# Altium PCB BISSC.PcbDoc
Units mm, origin at the board's own origin, x right, y up, seen from the top; angles counter-clockwise.
Board outline 56.9 x 61.5 mm, 2 copper layers (Top Layer, Bottom Layer), stack 0.143 mm thick; 29 components, 22 nets, 150 pads, 29 vias.
Unrouted connection lines stored in the file: 11.
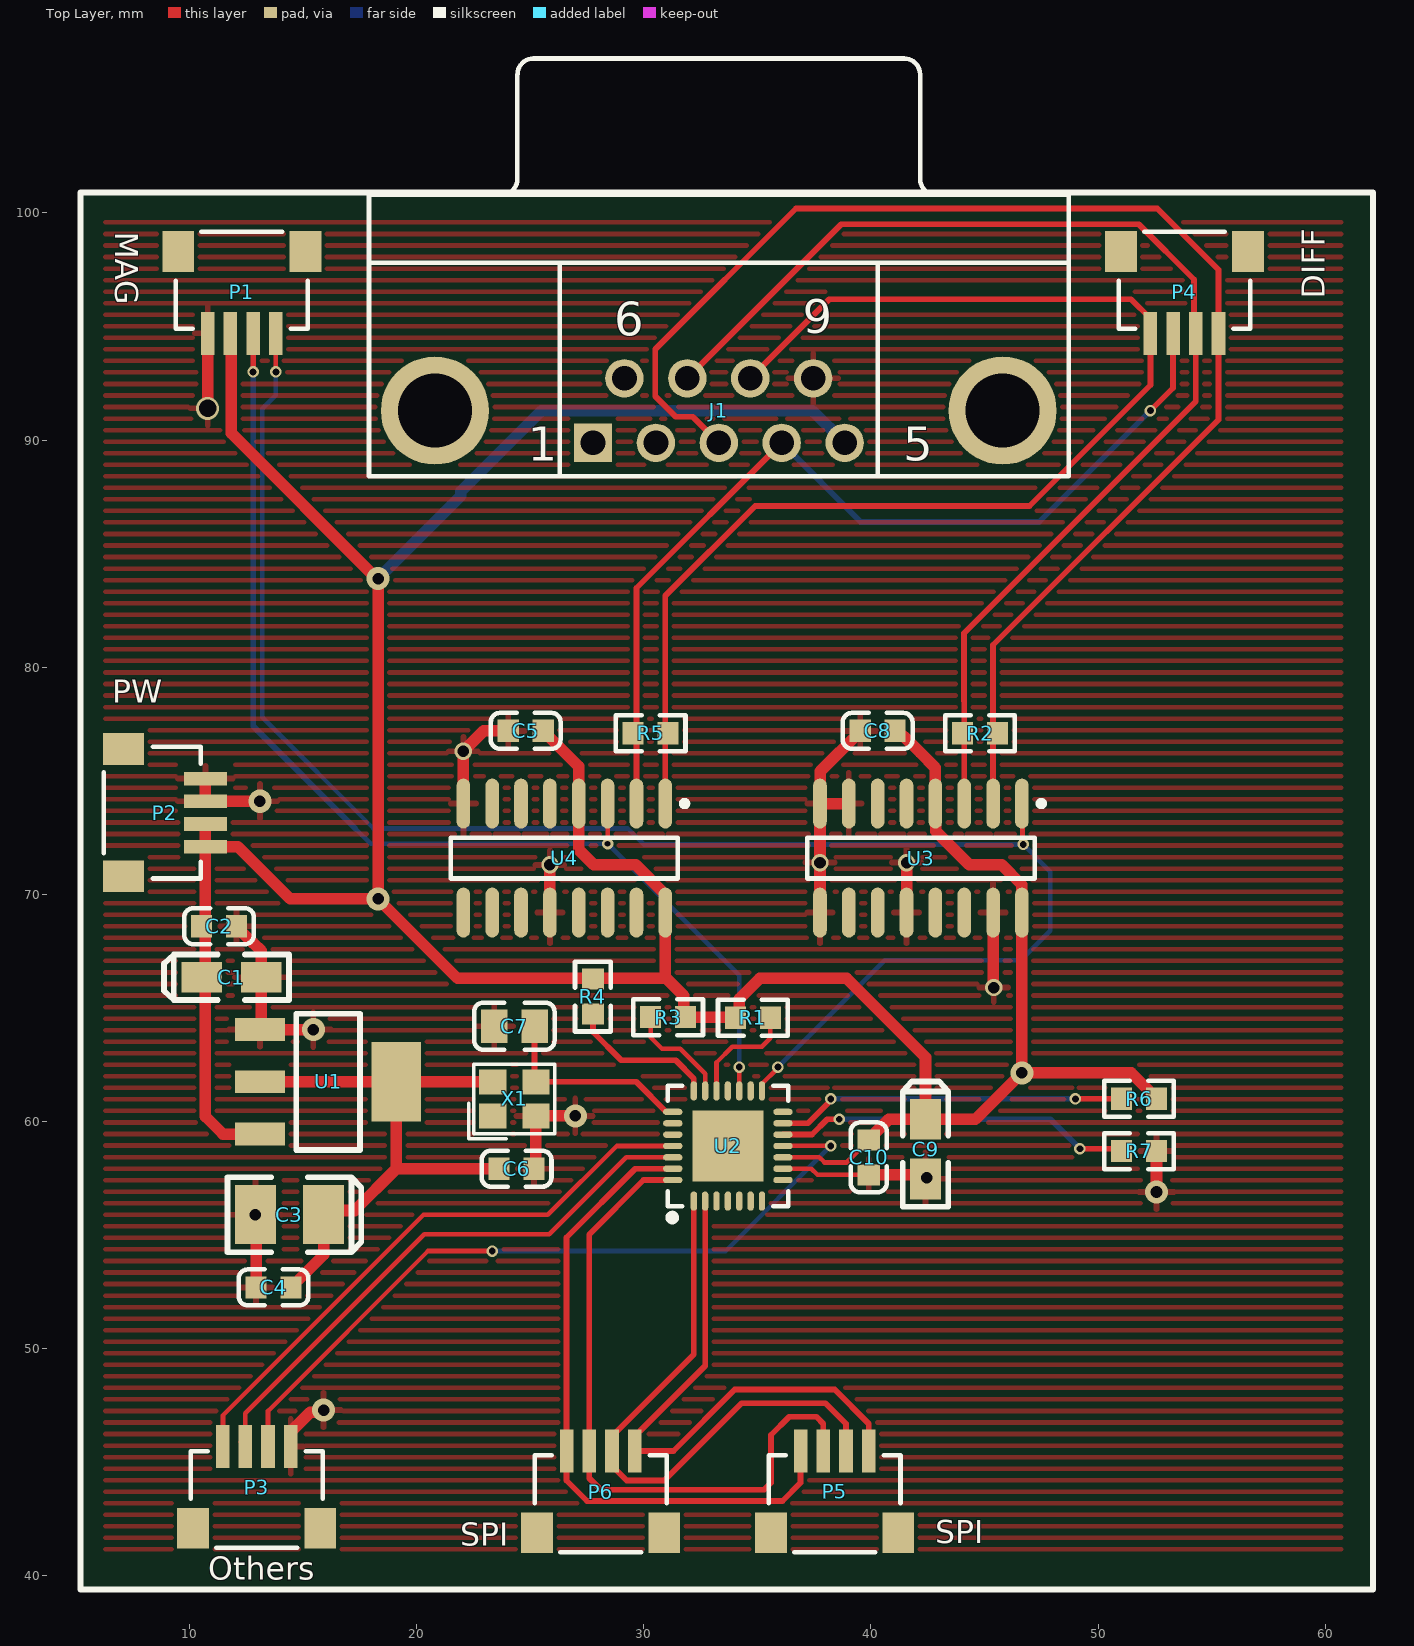
[diagram p0: Top Layer view]
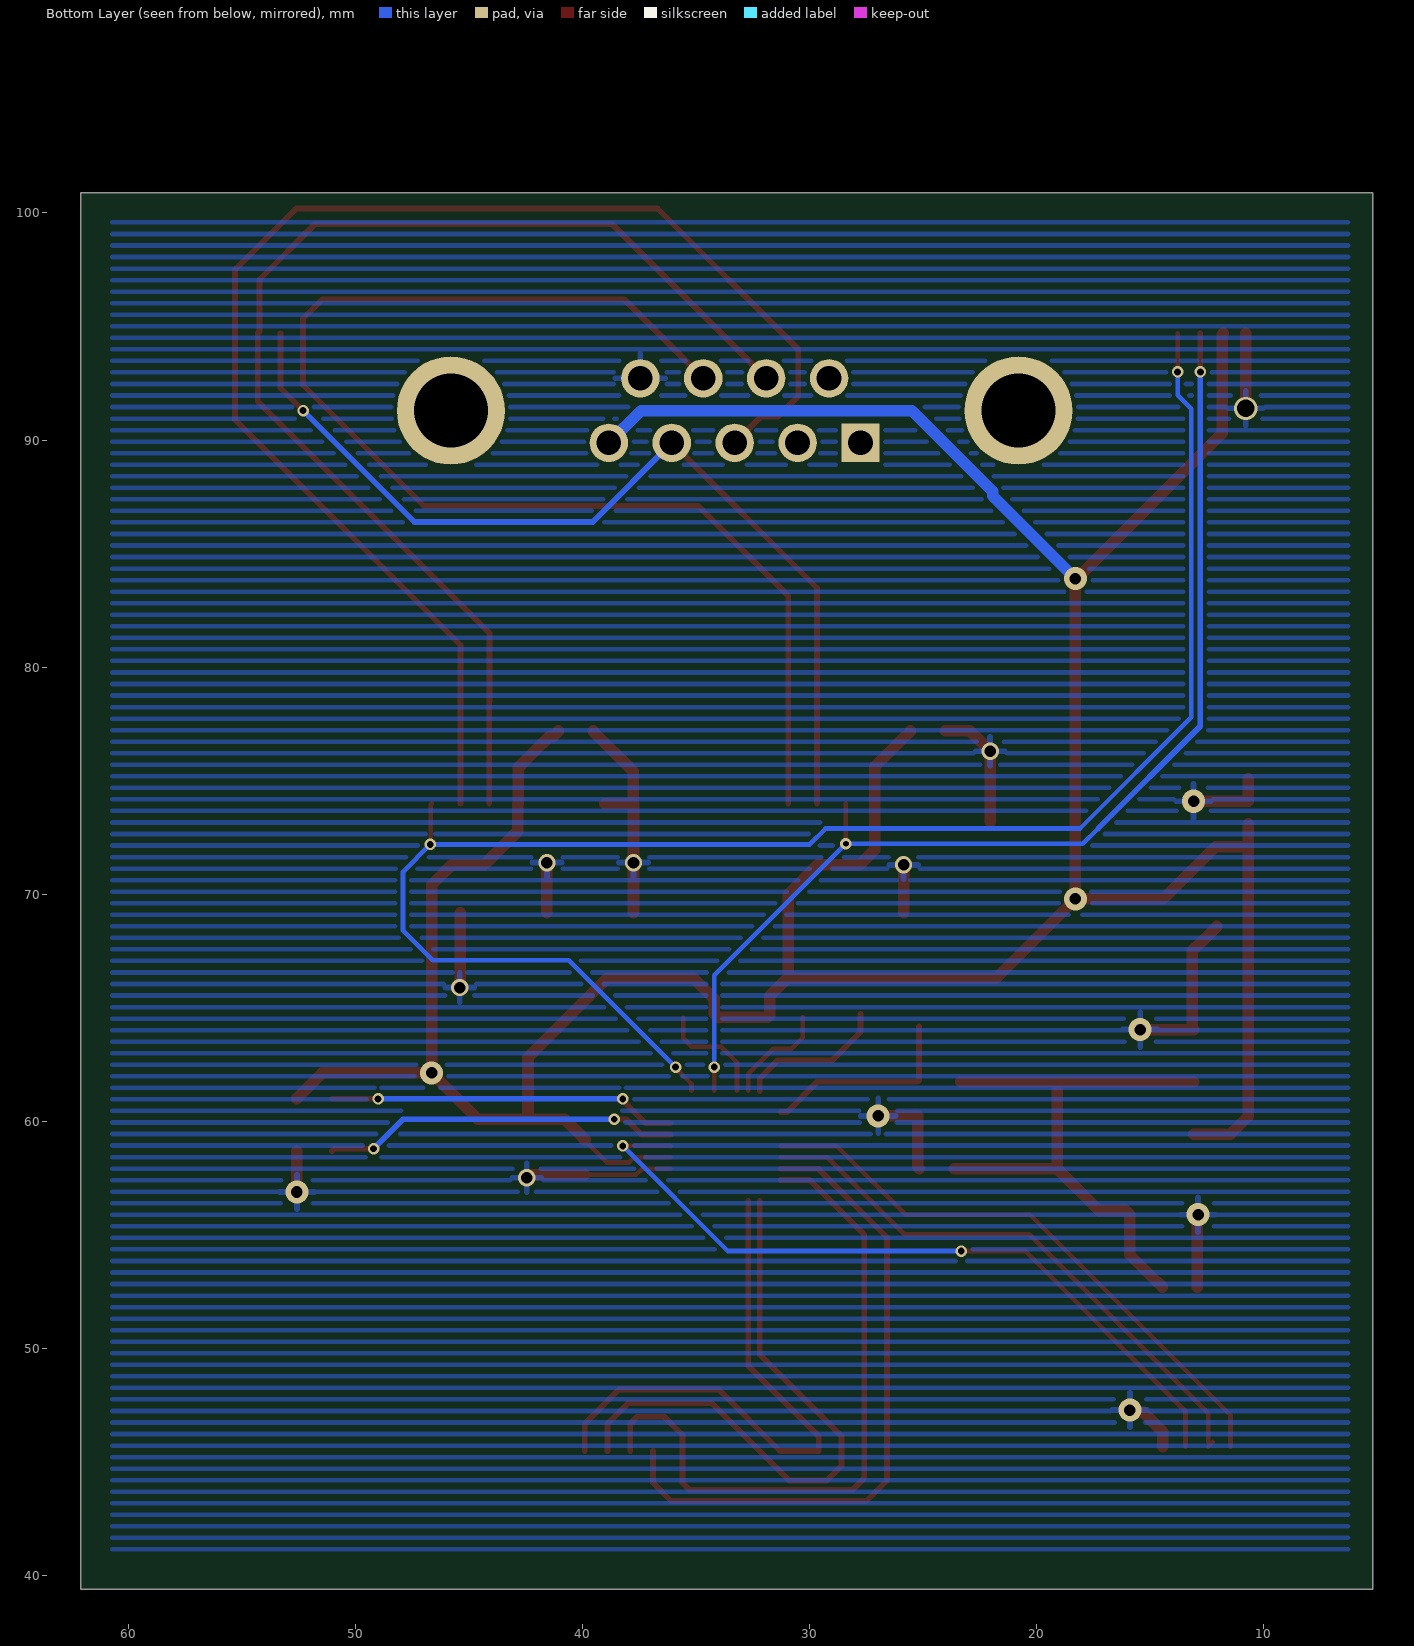
[diagram p1: Bottom Layer view, seen from below]
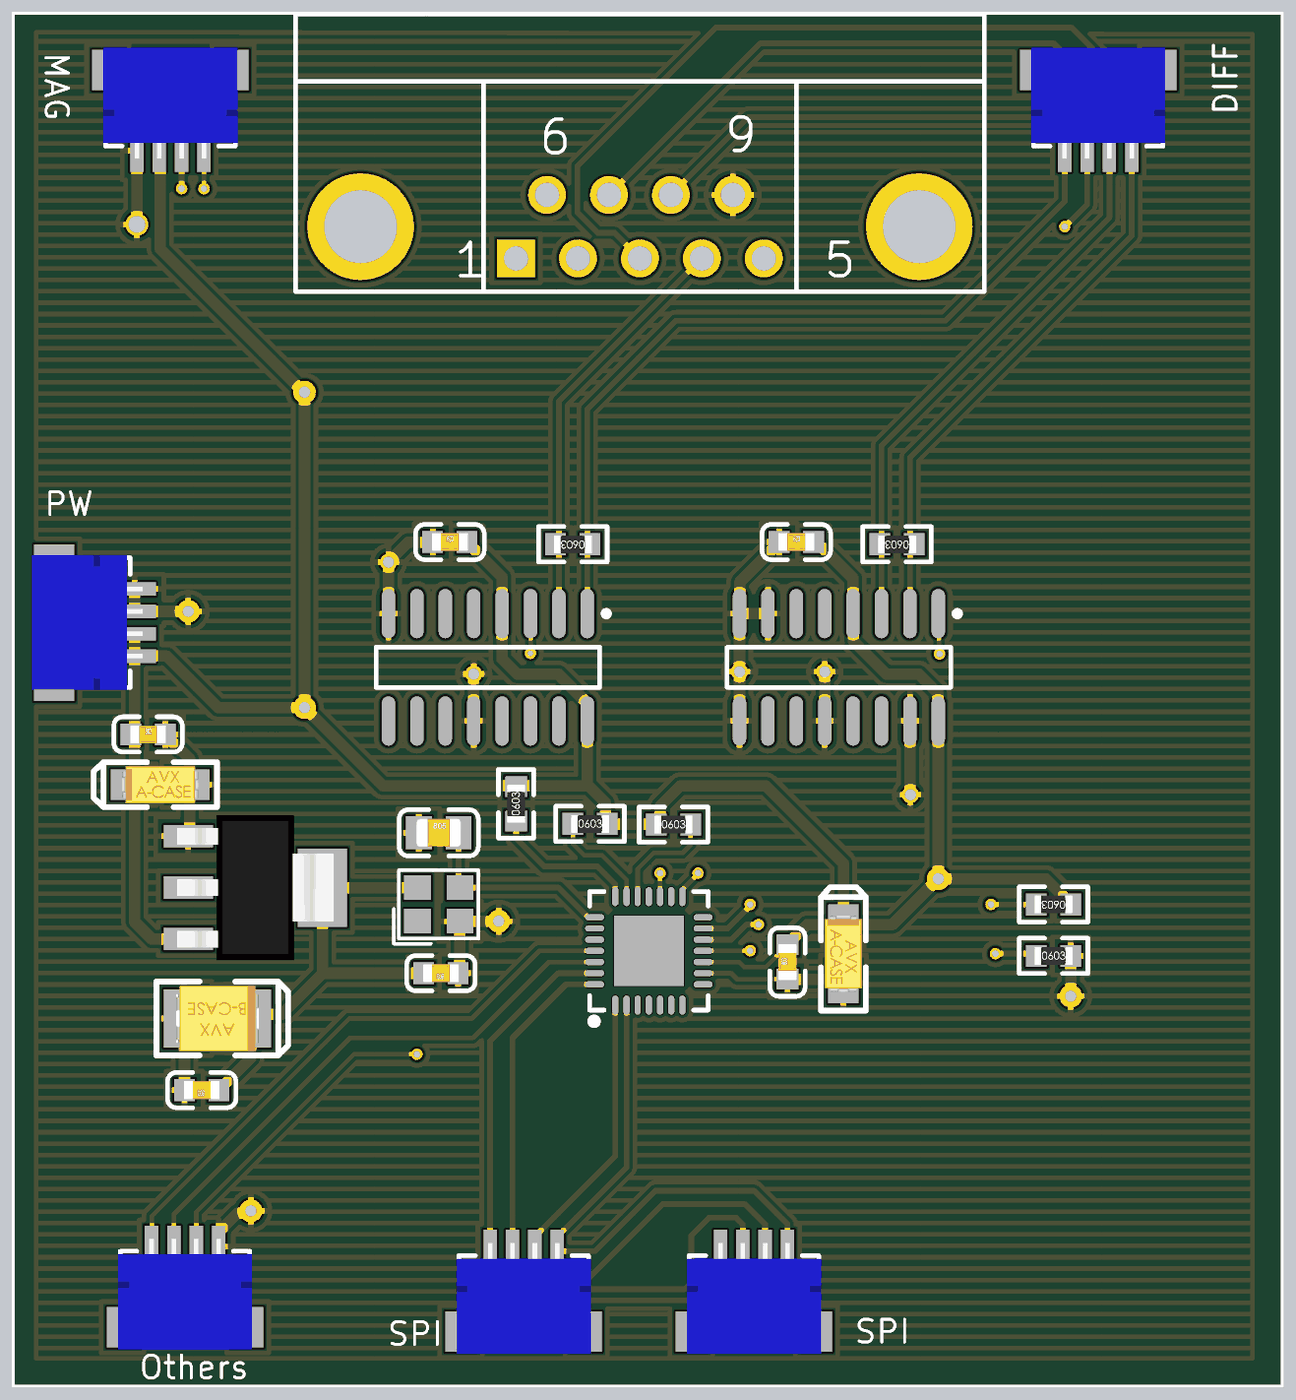
[diagram p2: 3D render of the assembled board from above, using the file's embedded part models]

## Layer stack, top to bottom
Top Solder: solder mask 0.01, Solder Resist, Dk 3.5
Top Layer: signal copper 0.036
Dielectric 3: prepreg 0.071, PP-006, Dk 4.1
Bottom Layer: signal copper 0.036
Bottom Solder: solder mask 0.01, Solder Resist, Dk 3.5

## Board outline
5.2,39.4 5.2,100.9 62.1,100.9 62.1,39.4

## Design rules (kind name [scope] priority, off if disabled: settings)
Clearance [All] p1: gap=0.15 ignorepadtopadclearanceinfootprint=FALSE
HoleSize [All] p1: absolutevalues=TRUE maxlimit=5.08 minlimit=0.025 maxpercent=80.000 minpercent=20.000
MinimumSolderMaskSliver [All] p1: minsoldermaskwidth=0
PolygonConnect [All] p1: connectstyle=Relief reliefconductorwidth=0.254 reliefentries=4 polygonreliefangle="90 Angle" airgapwidth=0.254
RoutingVias [All] p1: holewidth=0.711 width=1.27 viastyle="Through Hole" minholewidth=0.711 minwidth=1.27 maxholewidth=0.711 maxwidth=1.27
SilkToSilkClearance [All] p1: silktosilkclearance=0.1
SilkToSolderMaskClearance [IsPad] p1: minsilkscreentomaskgap=0.05 clearancetoexposedcopper=TRUE
SolderMaskExpansion [All] p1: expansion=0.102 istentingtop=FALSE
Width [All] p1: maxlimit=1.27 minlimit=0.01 preferedwidth=0.254
26 further rules are at their usual default settings.

## Components (designator, comment, footprint, x,y, rotation, side; value= is the part's Value field where it differs from the comment)
C1 "10uF (106) ±10% 16V" CASE-A_3216 11.846,66.355 r180 top
C2 "100nF (104) 10% 50V" 0603_C 11.3,68.6 r0 top
C3 "22uF (226) ±10% 16V" CASE-B_3528 14.4,55.9 r0 top
C4 "100nF (104) 10% 50V" 0603_C 13.7,52.7 r180 top
C5 "100nF (104) 10% 50V" 0603_C 24.8,77.2 r0 top
C6 "100nF (104) 10% 50V" 0603_C 24.4,57.925 r180 top
C7 "15uF (104) 10% 50V" 0805_C 24.3,64.2 r0 top
C8 "100nF (104) 10% 50V" 0603_C 40.295,77.2 r0 top
C9 "10uF (106) ±10% 16V" CASE-A_3216 42.4,58.79 r90 top
C10 "100nF (104) 10% 50V" 0603_C 39.9,58.425 r90 top
J1 "D Connector 9" DSUB1.385-2H9 33.3,100.8 r0 top
P1 "MHDR1X4" SH1.0-4P-L 12.3,96.5 r180 top
P2 "MHDR1X4" SH1.0-4P-L 8.9,73.6 r270 top
P3 "MHDR1X4" SH1.0-4P-L 12.956,43.896 r0 top
P4 "MHDR1X4" SH1.0-4P-L 53.8,96.5 r180 top
P5 "MHDR1X4" SH1.0-4P-L 38.4,43.7 r0 top
P6 "MHDR1X4" SH1.0-4P-L 28.1,43.7 r0 top
R1 "10KΩ (103) ±1%" 0603_R 34.8,64.57 r0 top
R2 "120Ω (1200) ±1%" 0603_R 44.8,77.1 r180 top
R3 "10KΩ (103) ±1%" 0603_R 31.07,64.6 r0 top
R4 "10KΩ (103) ±1%" 0603_R 27.76,65.5 r90 top
R5 "0Ω (0) ±1%" 0603_R 30.3,77.1 r180 top
R6 "1KΩ (102) ±1%" 0603_R 51.8,61 r180 top
R7 "10KΩ (103) ±1%" 0603_R 51.8,58.7 r0 top
U1 "AMS1117-3.3" SOT-223 16.1,61.75 r180 top
U2 "iC-MB4" QFN-28_5x5x05P 33.7,58.925 r0 top
U3 "AM26LS31" SO-16_N 42.2,71.6 r270 top
U4 "AM26LS32" SO-16_N 26.5,71.6 r270 top
X1 "20MHz" OSC-SMD_4P-L2.5-W2.0-BL 24.3,61 r0 top

## Footprints (in the part's own frame and the unit in brackets; to place one, negate y for a bottom-side part, rotate by r counter-clockwise, add the part's x,y. Pads: shape width x height; smd on the part's side, far side on the other; paste and mask are expansions set on the pad)
0603_C [mm]
  rect 0.93x0.98 smd: 1(-0.77,0) 2(0.77,0)
  silkscreen extent -1.53,-0.79 1.54,0.79, body extent -0.8,-0.4 0.8,0.4, height 0.3
0603_R [mm]
  rect 0.93x0.98 smd: 1(-0.77,0) 2(0.77,0)
  silkscreen extent -1.54,-0.79 1.54,0.79, body extent -0.85,-0.4 0.85,0.4, height 0.56
0805_C [mm]
  rect 1.16x1.47 smd: 1(-0.89,0) 2(0.89,0)
  silkscreen extent -1.77,-1.04 1.77,1.04, body extent -1,-0.62 1,0.63, height 0.77
CASE-A_3216 [mm]
  rect 1.8x1.35 smd: 1(1.31,0) 2(-1.31,0)
  silkscreen extent -2.54,-1 2.97,1, body extent -1.7,-0.84 1.7,0.84, height 1.71
CASE-B_3528 [mm]
  rect 1.8x2.6 smd: 1(1.5,0) 2(-1.5,0)
  silkscreen extent -2.73,-1.65 3.16,1.65, body extent -1.85,-1.47 1.85,1.46, height 2.03
DSUB1.385-2H9 [mm] "Connector; D Subminiature; 9 Position; Right Angle; Pitch 1.385 mm"
  rect 1.69x1.69 hole 1.09: 1(-5.54,-10.92)
  round 1.69 hole 1.09: 2(-2.77,-10.92) 3(0,-10.92) 4(2.77,-10.92) 5(5.54,-10.92) 6(-4.155,-8.08) 7(-1.385,-8.08) 8(1.385,-8.08) 9(4.155,-8.08)
  round 4.76 hole 3.26: 10(-12.495,-9.5) 11(12.495,-9.5)
  silkscreen extent -15.4,-12.4 15.4,6
OSC-SMD_4P-L2.5-W2.0-BL [mm]
  rect 1.2x1.1 smd: 1(-0.95,-0.75) 2(0.95,-0.75) 3(0.95,0.75) 4(-0.95,0.75)
  silkscreen extent -2.01,-1.76 1.78,1.53
QFN-28_5x5x05P [mm]
  rect 3.13x3.13 smd mask+0.051: 0(0,0)
  oval 0.28x0.85 smd mask+0.051: 1(-1.5,-2.425) 2(-1,-2.425) 3(-0.5,-2.425) 4(0,-2.425) 5(0.5,-2.425) 6(1,-2.425) 7(1.5,-2.425) 15(1.5,2.425) 16(1,2.425) 17(0.5,2.425) 18(0,2.425) 19(-0.5,2.425) 20(-1,2.425) 21(-1.5,2.425)
  oval 0.85x0.28 smd mask+0.051: 8(2.425,-1.5) 9(2.425,-1) 10(2.425,-0.5) 11(2.425,0) 12(2.425,0.5) 13(2.425,1) 14(2.425,1.5) 22(-2.425,1.5) 23(-2.425,1) 24(-2.425,0.5) 25(-2.425,0) 26(-2.425,-0.5) 27(-2.425,-1) 28(-2.425,-1.5)
  silkscreen extent -2.65,-3.3 2.65,2.65
SH1.0-4P-L [mm]
  rect 1.4x1.8 smd: 0(-2.8,-1.8) 0(2.8,-1.8)
  rect 0.6x1.9 smd: 1(-1.5,1.8) 2(-0.5,1.8) 3(0.5,1.8) 4(1.5,1.8)
  silkscreen extent -2.9,-2.67 2.9,1.6, body extent -3,-2.79 3,2.16, height 2.96
SO-16_N [mm] "SOIC, 16-Leads, Body 9.9x3.9mm, Pitch 1.27mm, IPC Medium Density"
  oval 2.2x0.6 smd: 1(-2.4,4.445) 2(-2.4,3.175) 3(-2.4,1.905) 4(-2.4,0.635) 5(-2.4,-0.635) 6(-2.4,-1.905) 7(-2.4,-3.175) 8(-2.4,-4.445) 9(2.4,-4.445) 10(2.4,-3.175) 11(2.4,-1.905) 12(2.4,-0.635) 13(2.4,0.635) 14(2.4,1.905) 15(2.4,3.175) 16(2.4,4.445)
  silkscreen extent -2.52,-5 0.9,5.42, body extent -2,-5 2,5, height 1.75
SOT-223 [mm]
  rect 2.2x1 smd: 1(3,-2.3) 2(3,0) 3(3,2.3)
  rect 2.2x3.5 smd: 2(-3,0)
  silkscreen extent -1.4,-3 1.4,3, body extent -3.49,-3.24 3.49,3.24, height 1.64

## Part data
C1 C3 C9: library part "3216 10uF (106) 10% 16V", "钽电容", Package=3216, SuppliersPartNumber=C7171, ComponentLink1Description=供应商链接, ComponentLink1URL=http://www.szlcsc.com/product/details_7643.html, Supplier=LC
C2 C4 C5 C6 C7 C8 C10: library part "0603 100nF (104) 10% 50V", "贴片电容", Package=0603, SuppliersPartNumber=C14663, ComponentLink1Description=供应商链接, ComponentLink1URL=http://www.szlcsc.com/product/details_15331.html, Supplier=LC
J1: "Receptacle Assembly, 9 Position, Right Angle", PackageDocument=O, DatasheetDocument=1-Sep-1999, Gender=Receptacle, LatestRevisionDate=17-Jul-2002, LatestRevisionNote="Re-released for DXP Platform.", Orientation="Right Angle", PackageReference=788750, Positions=9, Published=15-Jun-2001, Publisher="Altium Limited"
P1 P2 P3 P4 P5 P6: "Header, 4-Pin", LatestRevisionDate=17-Jul-2002, LatestRevisionNote="Re-released for DXP Platform.", Publisher="Altium Limited"
R1 R2 R3 R4 R5 R6 R7: library part "0603 360Ω (3600) 1%", "贴片电阻", Package=0603, SuppliersPartNumber=C25194, ComponentLink1Description=供应商链接, ComponentLink1URL=http://www.szlcsc.com/product/details_25937.html, Supplier=LC
U1: library part AMS1117, "3.3V稳压芯片"
U2: "SPI转BiSS主站芯片"
U3: "AM32LS31 单端转差分芯片"
U4: "AM26LS32 差分转单端"
X1: library part OT252020MJBA4SL, "2015 osc", Frequency Stability(Full temperature range)=±10ppm, JLCPCB Part Class="Extended Part", LCSC Part Name="20MHz ±10ppm 1.8V~3.3V YSO110TR", Manufacturer=YXC(扬兴晶振), Operating Temperature=-40℃~+85℃, Supply Current (Max)=4mA, Supply Voltage=1.8V~3.3V, Add into BOM=yes, Convert to PCB=yes, Datasheet=https://atta.szlcsc.com/upload/public/pdf/source/20210329/C669065_30B18CFE780D377BA4E84F6ED1951959.pdf, Device=OT252020MJBA4SL, Manufacturer Part=OT252020MJBA4SL, Name=20MHz, Supplier=LCSC, Supplier Footprint=SMD2520-4P, Supplier Part=C669067, Symbol=OT252020MJBA4SL

## Via types
v1: diameter 0.508, hole 0.3, Top Layer to Bottom Layer, 12 vias
v2: diameter 1.016, hole 0.508, Top Layer to Bottom Layer, 9 vias
v3: diameter 0.762, hole 0.508, Top Layer to Bottom Layer, 6 vias
v4: diameter 1.016, hole 0.762, Top Layer to Bottom Layer, 1 vias
v5: diameter 0.508, hole 0.254, Top Layer to Bottom Layer, 1 vias

## Nets (pads, with @x,y where several pads share a name; then routed paths per layer and width w, separated by ;. In a path a pad name is that pad's centre, name@x,y a point inside that pad or via, vN(x,y) a via of type N, cw(c..) or ccw(c..) an arc to the next point about the centre after c; other vN are vias at no path point)
CLK+: J1.3 P4.1 R2.1 U3.2 | length 61.8
  Top Layer w0.254: J1.3 32.153,91.027 31.403,91.027 30.5,91.93 30.5,94 36.7,100.2 52.6,100.2 55.3,97.5 P4.1 55.3,90.9 45.375,80.975 45.375,77.1 U3.2
CLK-: J1.7 P4.2 R2.2 U3.3 | length 53.5
  Top Layer w0.254: J1.7 38.695,99.5 51.792,99.5 54.218,97.074 54.218,94.782 P4.2 54.3,91.7 44.1,81.5 44.1,78.53 44.105,78.525 44.105,77.1 U3.3
CS: P5.1 P6.1 U2.27 | length 29
  Top Layer w0.254: U2.27 31.27,57.92 29.62,57.92 26.6,54.9 P6.1 26.6,44.2 27.5,43.3 36.1,43.3 36.9,44.1 P5.1
EOT: P3.3 U2.11 | length 33.3
  Top Layer w0.203: P3.3 13.456,47.256 20.5,54.3 v1(23.325,54.3) ; U2.11 36.128,58.928 38.227,58.928 v1(38.23,58.931)
  Bottom Layer w0.203: v1(23.325,54.3) 33.599,54.3 v1(38.23,58.931)
EXCLK: C7.2 U2.22 X1.3 | length 9
  Top Layer w0.203: X1.3@25.19,61.81 X1.3
  Top Layer w0.254: X1.3@25.19,61.81 C7.2 ; X1.3 29.665,61.75 30.99,60.425 U2.22
GND: C1.2 C2.2 C3.2 C4.2 C5.1 C6.1 C7.1 C8.1 C9.2 C10.1 J1.9 P1.4 P2.1 P2.2 P3.4 R7.2 U1.1 U2.9 U3.7 U3.8 U3.9 U3.12 U3.15 U4.8 U4.12 X1.2 | length 55.2
  Top Layer w0.203: U2.9 37.375,57.925 37.645,57.655 C10.1
  Top Layer w0.508: P2.1 P2.2 v2(13.1,74.1) ; v4(10.8,91.4) P1.4 ; C2.2 12.07,68.575 12.772,67.873 12.797,67.873 13.156,67.514 C1.2 13.156,64.106 U1.1 v2(15.45,64.05) ; v2(12.9,55.9) 12.93,55.87 C4.2 ; P3.4 14.456,46.346 15.313,47.203 15.803,47.203 v2(15.9,47.3) ; U4.8@22.055,73.2 U4.8 v3(22.055,76.3) 22.955,77.2 C5.1 ; C6.1 25.25,58.005 X1.2 v2(26.985,60.25) ; U4.12 v3(25.865,71.3) ; U3.9 v3(37.755,71.4) U3.8 ; U3.7 U3.8 ; C8.1 39.525,77.175 37.773,75.423 37.773,74.018 U3.8 ; C10.1 42.325,57.655 v3(42.45,57.53) ; U3.12 v3(41.565,71.4) ; U3.15 45.387,69.187 45.387,65.913 v3(45.4,65.9) ; v2(52.57,56.9) R7.2
MA: P1.1 U2.15 U3.1 | length 74.9
  Top Layer w0.203: v1(13.8,93) P1.1 ; U2.15 35.2,61.656 35.9,62.356 v1(35.9,62.4) ; U3.1 46.672,73.972 46.672,72.228 v1(46.7,72.2)
  Bottom Layer w0.203: v1(13.8,93) 13.8,91.975 13.2,91.375 13.2,77.8 18.1,72.9 29.3,72.9 30,72.2 v1(46.7,72.2) 47.9,71 47.9,68.405 46.595,67.1 40.6,67.1 v1(35.9,62.4)
MISO: P5.4 P6.4 U2.2 | length 25.5
  Top Layer w0.254: U2.2 32.7,49.25 29.6,46.15 P6.4 31.3,45.5 34,48.2 38.4,48.2 39.9,46.7 P5.4
MOSI: P5.3 P6.3 U2.1 | length 26.7
  Top Layer w0.254: U2.1 32.2,49.75 28.6,46.15 P6.3 28.6,44.85 29.25,44.2 30.9,44.2 34.3,47.6 38,47.6 38.9,46.7 P5.3
NetR1_2: R1.2 U2.19 | length 5
  Top Layer w0.203: U2.19 33.2,62.6 33.9,63.3 35.2,63.3 35.57,63.67 R1.2
NetR3_1: R3.1 U2.20 | length 4.7
  Top Layer w0.203: R3.1 30.3,63.7 30.8,63.2 31.6,63.2 32.7,62.1 U2.20
NetR4_1: R4.1 U2.21 | length 6.6
  Top Layer w0.254: R4.1 27.76,63.945 29.005,62.7 31.4,62.7 32.2,61.9 U2.21
NetR6_2: R6.2 U2.13 | length 15.4
  Top Layer w0.254: U2.13 37.23,59.925 38.23,60.925 v1(38.23,61) ; v1(49,61) R6.2
  Bottom Layer w0.254: v1(38.23,61) v1(49,61)
NetR7_1: R7.1 U2.12 | length 15.8
  Top Layer w0.254: U2.12 37.4,59.425 38.075,60.1 v1(38.6,60.1) ; v1(49.2,58.8) 50.93,58.8 R7.1
  Bottom Layer w0.254: v1(38.6,60.1) 47.9,60.1 v1(49.2,58.8)
NRD_RNW: P3.2 U2.26 | length 25
  Top Layer w0.203: P3.2@12.258,45.894 P3.2 ; P3.2@12.456,45.894 12.456,47.156 20.334,55.034 25.834,55.034 29.225,58.425 U2.26
NWR_E: P3.1 U2.25 | length 26.1
  Top Layer w0.203: P3.1@11.473,45.696 11.473,47.073 20.3,55.9 25.775,55.9 28.8,58.925 U2.25
SCLK: P5.2 P6.2 U2.28 | length 29.8
  Top Layer w0.254: U2.28 29.991,57.425 27.6,55.034 P6.2 27.6,44.3 28.104,43.796 35.296,43.796 35.6,44.1 35.6,46.2 36.4,47 37.6,47 37.9,46.7 P5.2
SL: P1.2 U2.17 U4.3 | length 49.9
  Top Layer w0.203: v5(28.405,72.228) U4.3 ; U2.17 v1@34.2,62.2
  Top Layer w0.254: v1(12.8,93) P1.2
  Bottom Layer w0.203: 17.3,72.9 17.972,72.228 v5(28.405,72.228) 34.2,66.433 v1(34.2,62.4)
  Bottom Layer w0.254: v1(12.8,93) 12.8,77.4 17.3,72.9
SLO+: J1.4 P4.3 R5.2 U4.2 | length 42
  Top Layer w0.254: U4.2 29.675,83.485 J1.4 ; v1(52.3,91.3) 53.3,92.3 P4.3
  Bottom Layer w0.254: J1.4 39.55,86.4 47.4,86.4 v1(52.3,91.3)
SLO-: J1.8 P4.4 R5.1 U4.1 | length 56.7
  Top Layer w0.254: U4.1 30.945,83.145 34.9,87.1 46.975,87.1 52.3,92.425 P4.4 52.3,95.35 51.45,96.2 38.165,96.2 J1.8
VCC3.3V: C3.1 C4.1 C6.2 U1.2 X1.4 | length 26.3
  Top Layer w0.508: U1.2@13.1,61.75 19.1,61.75 19.1,57.92 ; C4.1 14.47,52.725 14.681,52.936 14.706,52.936 15.9,54.13 C3.1 16.084,56.084 17.264,56.084 19.1,57.92 ; U1.2@19.25,61.75 X1.4 ; C6.2 19.105,57.925 19.1,57.92
VCC5V: C1.1 C2.1 C5.2 C8.2 C9.1 C10.2 J1.5 P1.3 P2.3 P2.4 R1.1 R3.2 R4.2 R6.1 U1.3 U2.10 U3.4 U3.16 U4.4 U4.16 | length 159.4
  Top Layer w0.203: U2.10 37.73,58.425 37.955,58.2 38.93,58.2 C10.2@39.925,59.195 ; C10.2@39.875,59.195 C10.2
  Top Layer w0.508: P2.3 P2.4 ; P1.3 11.846,94.654 11.846,90.3 18.246,83.9 v2(18.3,83.9) 18.3,70.7 v2(18.3,69.8) ; U1.3 11.473,59.45 10.7,60.223 10.7,69.8 P2.4 ; C5.2 25.57,77.175 25.781,76.964 25.806,76.964 27.135,75.635 U4.4 27.135,71.965 27.8,71.3 29.645,71.3 30.945,70 30.945,66.345 30.9,66.3 21.8,66.3 v2(18.3,69.8) ; 30.945,66.355 31.762,65.538 31.762,64.678 31.855,64.585 34.015,64.585 R1.1 34.208,64.748 34.208,65.408 35.1,66.3 38.935,66.3 42.4,62.835 C9.1 ; C10.2@39.875,59.195 40.78,60.1 C9.1 ; C10.2 C10.2@39.925,59.195 ; C8.2 41.065,77.175 41.276,76.964 41.446,76.964 42.164,76.246 42.835,75.575 U3.4 42.853,73.982 42.853,72.775 44.328,71.3 45.763,71.3 46.627,70.436 46.627,69.218 U3.16 v2(46.645,62.145) ; R6.1 52.57,61.025 51.45,62.145 v2(46.645,62.145) ; P2.4 12.13,72.1 14.43,69.8 v2(18.3,69.8) ; C9.1 44.6,60.1 v2(46.645,62.145)
  Bottom Layer w0.508: v2(18.3,83.9) 21.949,87.549 21.949,87.749 25.5,91.3 37.42,91.3 J1.5
pads on no net: J1.1 J1.2 J1.6 J1.10 J1.11 P1.0 P2.0 P3.0 P4.0 P5.0 P6.0 U2.0 U2.3 U2.4 U2.5 U2.6 U2.7 U2.8 U2.14 U2.16 U2.18 U2.23 U2.24 U3.5 U3.6 U3.10 U3.11 U3.13 U3.14 U4.5 U4.6 U4.7 U4.9 U4.10 U4.11 U4.13 U4.14 U4.15 X1.1

## Polygon pours and split planes (outlines as drawn)
GND on Bottom Layer "GND_L02_P001" (hatched Horizontal grid 0.508 track 0.203, remove dead copper, pour order 1): 6.3,100 6.3,40.7 60.7,40.7 60.7,99.9
GND on Top Layer "GND_L01_P000" (hatched Horizontal grid 0.508 track 0.203, remove dead copper, pour order 0): 6.3,100 6.3,40.7 60.7,40.7 60.7,99.9

## Silkscreen, mask and mechanical layers (free items; w line width, h text height)
Top Overlay:
  the board outline again, w0.254
  text "MAG" at 6.727,99.173 h1.02 r270
  text "DIFF" at 59.973,96.227 h1.02 r90
  text "PW" at 6.587,78.427 h1.02
  text "SPI" at 42.827,41.427 h1.02
  text "SPI" at 21.927,41.327 h1.02
  text "Others" at 10.827,39.827 h1.02

## Text inside footprints (layer, text, board x,y; h text height)
J1: Top Overlay "6" at 28.7,94.6 h1.5; Top Overlay "9" at 37,94.7 h1.5; Top Overlay "5" at 41.43,89.1 h1.5; Top Overlay "1" at 24.9,89.1 h1.5